# Altium PCB SD_Card.PcbDoc
Units mil, origin at the board's own origin, x right, y up, seen from the top; angles counter-clockwise.
Board outline 1025 x 785 mil, 2 copper layers (Top Layer, Bottom Layer); 6 components, 6 nets, 29 pads, 0 vias.
Unrouted connection lines stored in the file: 18.
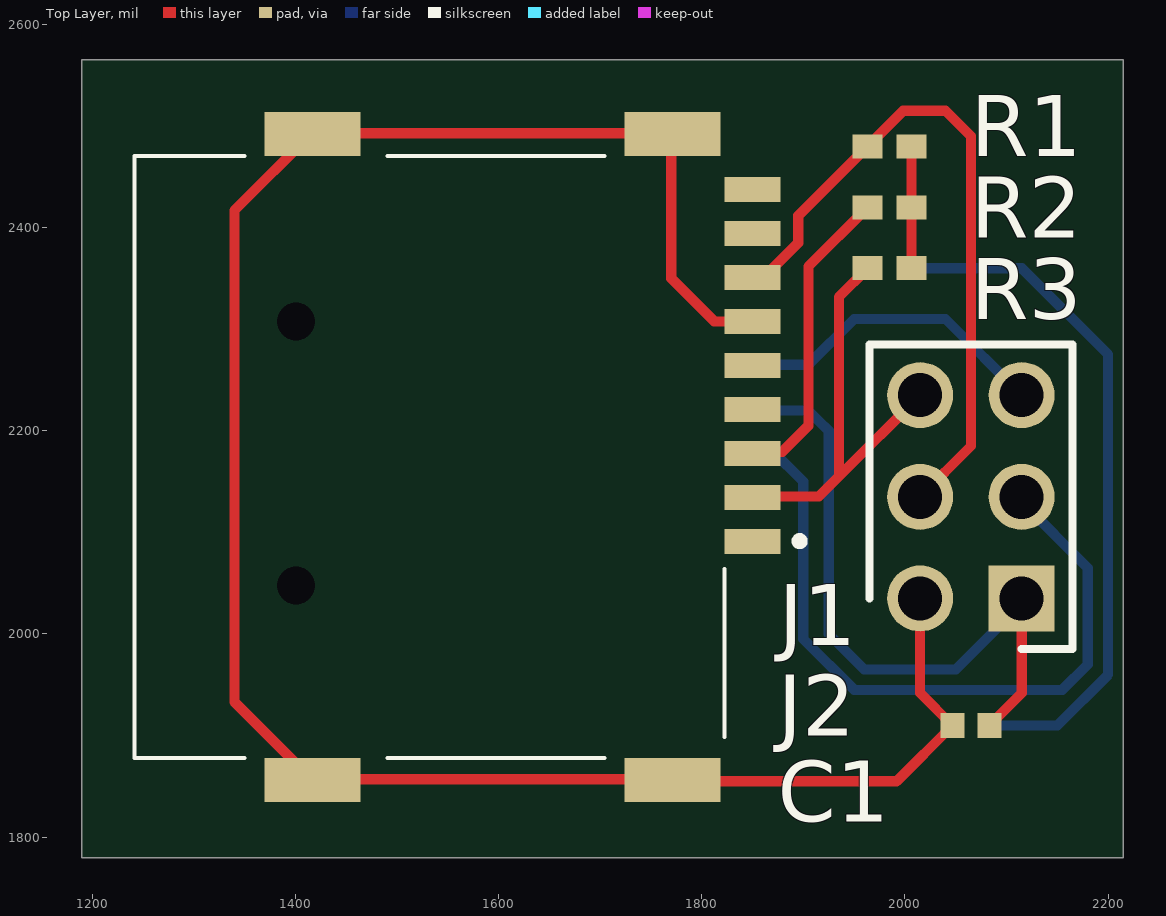
[diagram p0: Top Layer view]
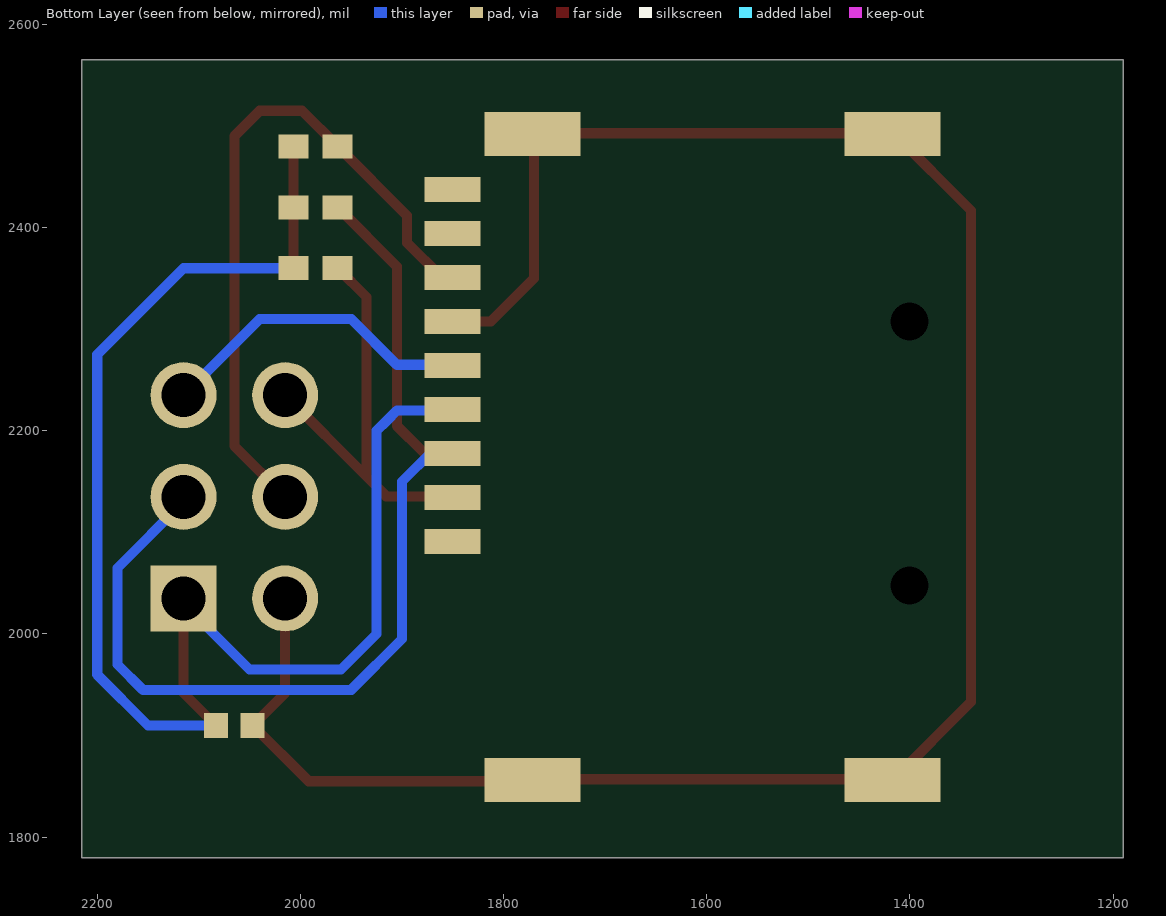
[diagram p1: Bottom Layer view, seen from below]

## Layer stack, top to bottom
Top Solder: solder mask 0.4, Solder Resist, Dk 3.5
Top Layer: signal copper 1.4
Dielectric 1: dielectric 12.6, FR-4, Dk 4.8
Bottom Layer: signal copper 1.4
Bottom Solder: solder mask 0.4, Solder Resist, Dk 3.5

## Board outline
1190,2565 2215,2565 2215,1780 1190,1780

## Design rules (kind name [scope] priority, off if disabled: settings)
Clearance [All] p1: gap=10 ignorepadtopadclearanceinfootprint=FALSE except(0: Arc-Hole Track-Hole SMDPad-Hole THPad-Hole Via-Hole Fill-Hole Poly-Hole Region-Hole Text-Hole)
PolygonConnect [All] p1: connectstyle=Relief reliefconductorwidth=10 reliefentries=4 polygonreliefangle="90 Angle" airgapwidth=10
RoutingVias [All] p1: holewidth=28 width=50 viastyle="Through Hole" minholewidth=28 minwidth=50 maxholewidth=28 maxwidth=50
SolderMaskExpansion [All] p1: expansion=4 istentingtop=FALSE
Width [All] p1: maxlimit=10 minlimit=10 preferedwidth=10
30 further rules are at their usual default settings.

## Components (designator, comment, footprint, x,y, rotation, side; value= is the part's Value field where it differs from the comment)
C1 "JMK105BJ105KV-F" CAPC1005X55N 2065,1910 r180 top
J1 "MEM2075-00-140-01-A" MEM20750014001A 1545.98,2174.02 r270 top
J2 "M20-9980346" HDRV6W64P254_2X3_762X508X868P 2115,2035 r90 top
R1 "RC0402JR-0710KL" RESC1005X40N 1985,2480 r0 top
R2 "RC0402JR-0710KL" RESC1005X40N 1985,2420 r0 top
R3 "RC0402JR-0710KL" RESC1005X40N 1985,2360 r0 top

## Footprints (in the part's own frame and the unit in brackets; to place one, negate y for a bottom-side part, rotate by r counter-clockwise, add the part's x,y. Pads: shape width x height; smd on the part's side, far side on the other; paste and mask are expansions set on the pad)
CAPC1005X55N [mm]
  rect 0.6x0.62 all layers, no hole: 1(-0.46,0) 2(0.46,0)
  body extent -0.5,-0.25 0.5,0.25, height 0.55
HDRV6W64P254_2X3_762X508X868P [mm]
  rect 1.65x1.65 hole 1.1: 1(0,0)
  round 1.65 hole 1.1: 2(0,2.54) 3(2.54,0) 4(2.54,2.54) 5(5.08,0) 6(5.08,2.54)
  silkscreen extent -1.27,-1.27 6.35,3.81, body extent -1.27,-1.27 6.35,3.81, height 8.68
MEM20750014001A [mm]
  round 0.475 hole 0.95 unplated: 14(-3.395,-3.695) 15(3.205,-3.695)
  rect 1.1x2.4 all layers, no hole: MP1(-8.075,5.725) MP2(-8.075,-3.275) MP3(8.075,-3.275) MP4(8.075,5.725)
  rect 0.62x1.4 all layers, no hole: P1(2.105,7.725) P2(1.005,7.725) P3(-0.095,7.725) P4(-1.195,7.725) P5(-2.295,7.725) P6(-3.395,7.725) P7(-4.495,7.725) P8(-5.595,7.725) P9(-6.695,7.725)
  silkscreen extent -7.52,-7.73 7.52,9, body extent -8.22,-7.95 8.23,7.9, height 1.4
RESC1005X40N [mm]
  rect 0.75x0.6 all layers, no hole: 1(-0.55,0) 2(0.55,0)
  body extent -0.5,-0.25 0.5,0.25, height 0.4

## Part data
C1: "Capacitor", Manufacturer_Name="TAIYO YUDEN", Mouser Part Number=963-JMK105BJ105KV-F, Datasheet Link=https://datasheet.datasheetarchive.com/originals/distributors/Datasheets-DGA20/25674.pdf, Height=0.55mm, Manufacturer_Part_Number=JMK105BJ105KV-F, Mouser Price/Stock=https://www.mouser.co.uk/ProductDetail/Taiyo-Yuden/JMK105BJ105KV-F?qs=I6KAKw0tg2yJ6Hx%2Fbib9CA%3D%3D
J1: "Connector", Manufacturer_Name="GCT (GLOBAL CONNECTOR TECHNOLOGY)", Mouser Part Number=640-MEM20750014001A, Datasheet Link=http://www.farnell.com/cad/2606866.pdf, Height=1.45mm, Manufacturer_Part_Number=MEM2075-00-140-01-A, Mouser Price/Stock=https://www.mouser.co.uk/ProductDetail/GCT/MEM2075-00-140-01-A?qs=KUoIvG%2F9IlZvfWpeERlq3Q%3D%3D
J2: "Connector", Manufacturer_Name=Harwin, Mouser Part Number=855-M20-9980346, Datasheet Link=https://cdn.harwin.com/pdfs/M20-998.pdf?utm_source=3D_PDF&utm_medium=3D_PDF&utm_campaign=3D_PDF, Height=8.68mm, Manufacturer_Part_Number=M20-9980346, Mouser Price/Stock=https://www.mouser.co.uk/ProductDetail/Harwin/M20-9980346?qs=%252Bk6%2F5FB6qrmHk2P20oz3FA%3D%3D
R1 R2 R3: "Resistor", Manufacturer_Name=KEMET, Mouser Part Number=603-RC0402JR-0710KL, Datasheet Link=https://datasheet.datasheetarchive.com/originals/distributors/Datasheets_SAMA/902f9e387b938f871d31120f5fc1d65e.pdf, Height=0.4mm, Manufacturer_Part_Number=RC0402JR-0710KL, Mouser Price/Stock=https://www.mouser.co.uk/ProductDetail/YAGEO/RC0402JR-0710KL?qs=V1yeUXFNrkk4BhFptVo0Rw%3D%3D

## Nets (pads, with @x,y where several pads share a name; then routed paths per layer and width w, separated by ;. In a path a pad name is that pad's centre, name@x,y a point inside that pad or via, vN(x,y) a via of type N, cw(c..) or ccw(c..) an arc to the next point about the centre after c; other vN are vias at no path point)
+3.3V: C1.1 J1.P4 J2.1 R1.2 R2.2 R3.2
GND: C1.2 J1.MP1 J1.MP2 J1.MP3 J1.MP4 J1.P6 J2.2
NetJ1_P2: J1.P2 J2.6 R3.1
NetJ1_P3: J1.P3 J2.3 R2.1
NetJ1_P5: J1.P5 J2.5
NetJ1_P7: J1.P7 J2.4 R1.1
pads on no net: J1.14 J1.15 J1.P1 J1.P8 J1.P9
copper on no net: | length 5993.6
  Top Layer w10: 1849.13,2135.43 1915.43,2135.43 1935,2155 ; 1849.76,2179.37 1879.37,2179.37 1905,2205 1905,2255 1905,2361.65 1963.35,2420 ; 1850.12,2307.68 1812.32,2307.68 1770,2350 1770,2405 1770,2492.52 1770.39,2492.91 1416.06,2492.91 1340,2416.85 1340,2330 1340,1933.15 1416.06,1857.09 1770.39,1857.09 1772.48,1855 1965,1855 1991.89,1855 2046.89,1910 2015,1941.89 2015,1956.89 2015,2035 ; 1850.12,2350.98 1860.98,2350.98 1895,2385 1895,2411.65 1963.35,2480 1998.35,2515 2010,2515 2040,2515 2065,2490 2065,2185 2015,2135 ; 1963.35,2360 1935,2331.65 1935,2190 1935,2155 ; 2006.65,2360 2006.65,2420 2006.65,2480 ; 2015,2235 1935,2155 ; 2083.11,1910 2115,1941.89 2115,1956.89 2115,2035
  Bottom Layer w10: 1849.13,2265.35 1849.49,2265 1905,2265 1950,2310 2015,2310 2040,2310 2115,2235 ; 1850.39,2180 1870,2180 1900,2150 1900,1995 1950,1945 2155,1945 2180,1970 2180,2065 2115,2130 2115,2135 ; 1851.18,2220 1905,2220 1915,2210 1925,2200 1925,2000 1960,1965 2050,1965 2115,2030 2115,2035 ; 2006.65,2360 2115,2360 2200,2275 2200,1960 2150,1910 2083.11,1910